# Altium PCB MC_Isolation_PCB.PcbDoc
Units mm, origin at the board's own origin, x right, y up, seen from the top; angles counter-clockwise.
Board outline 93 x 123 mm, 2 copper layers (Top Layer, Bottom Layer); 26 components, 24 nets, 115 pads, 17 vias.
Unrouted connection lines stored in the file: 16.
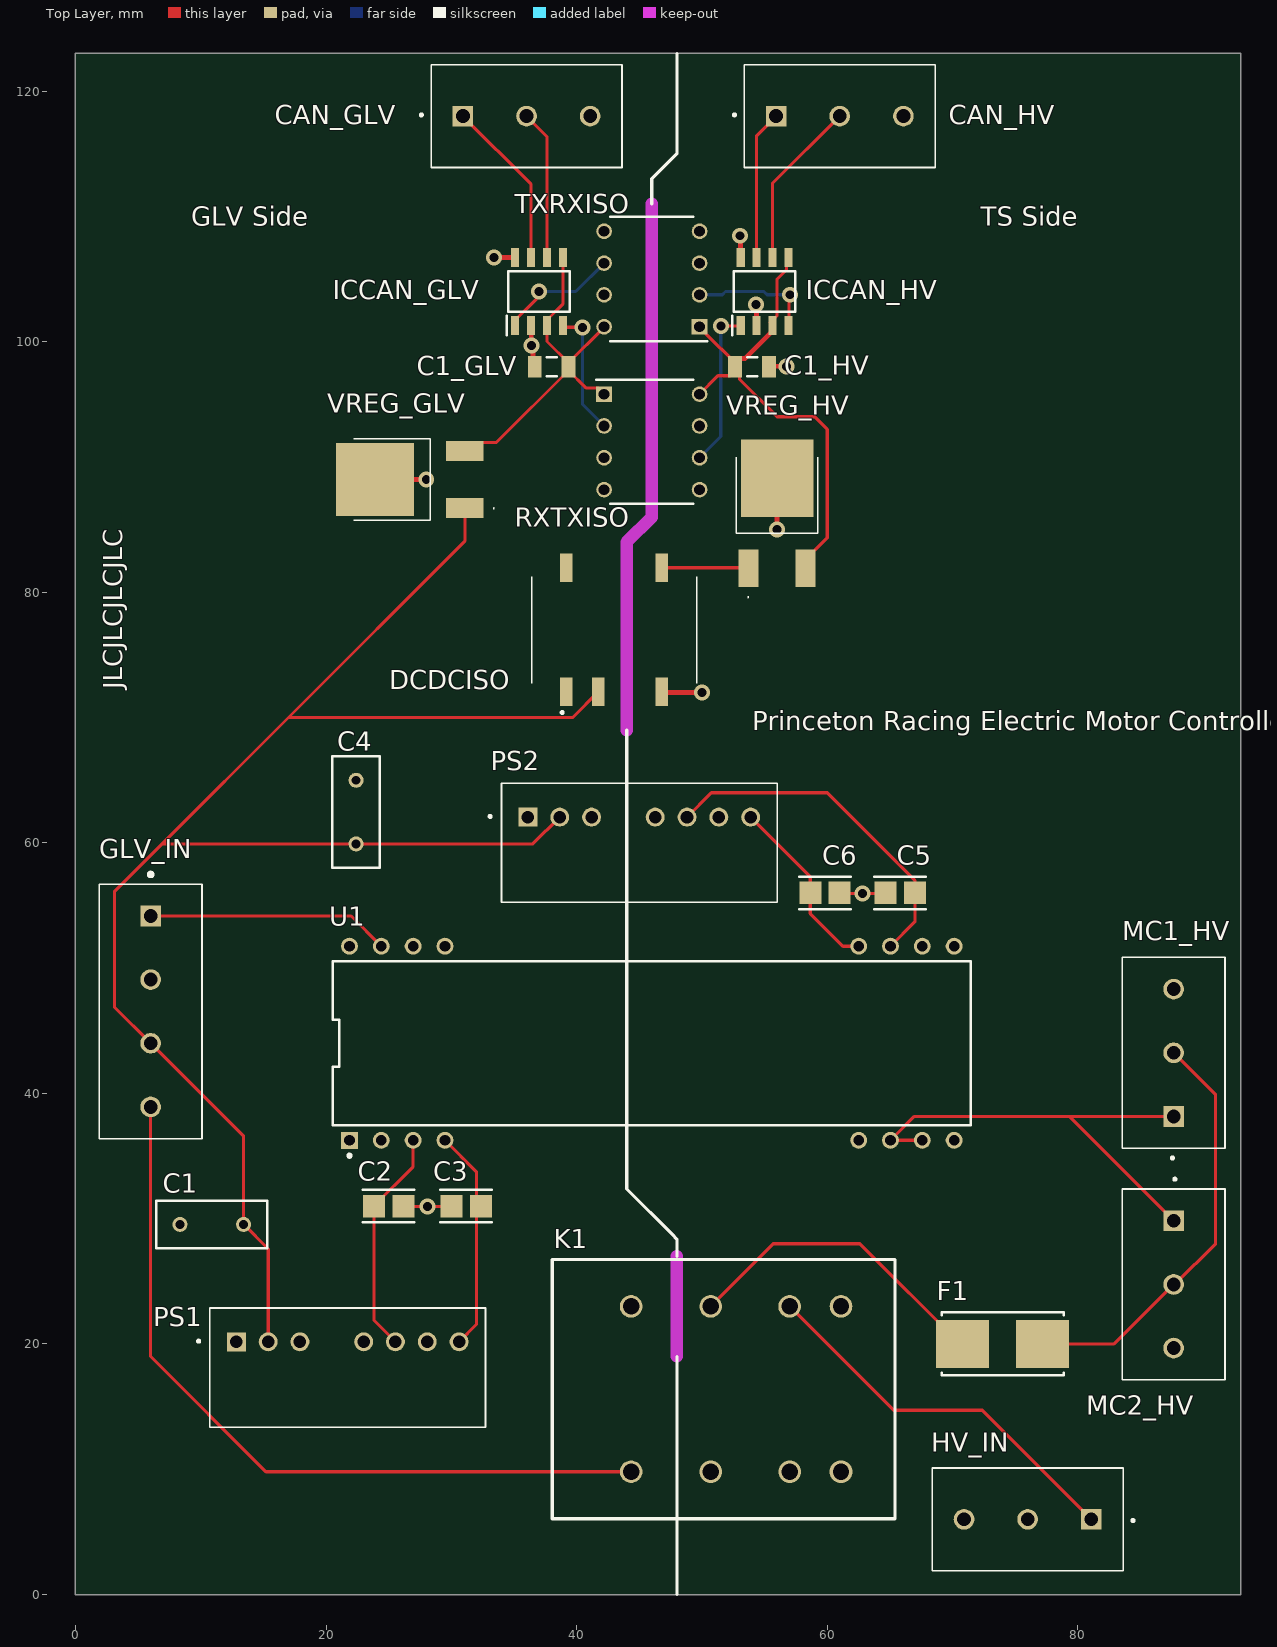
[diagram p0: Top Layer view]
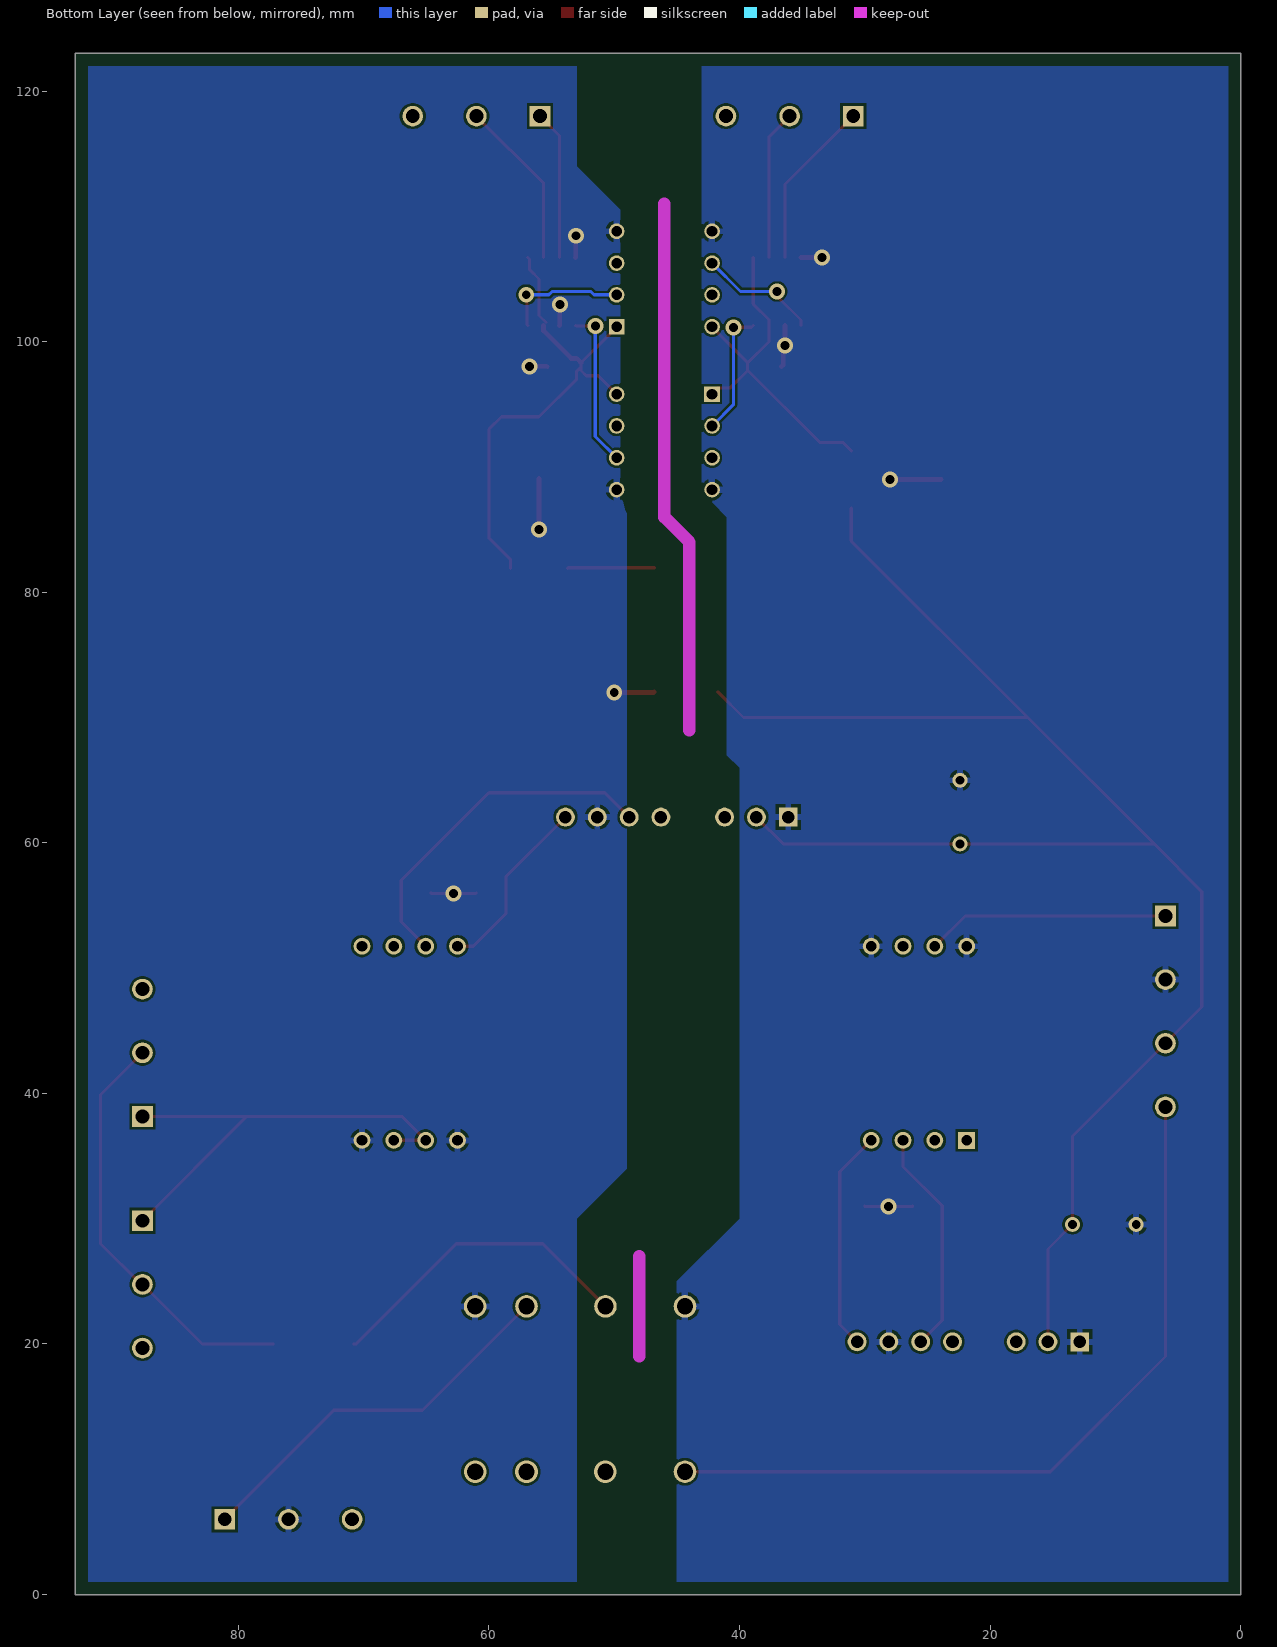
[diagram p1: Bottom Layer view, seen from below]
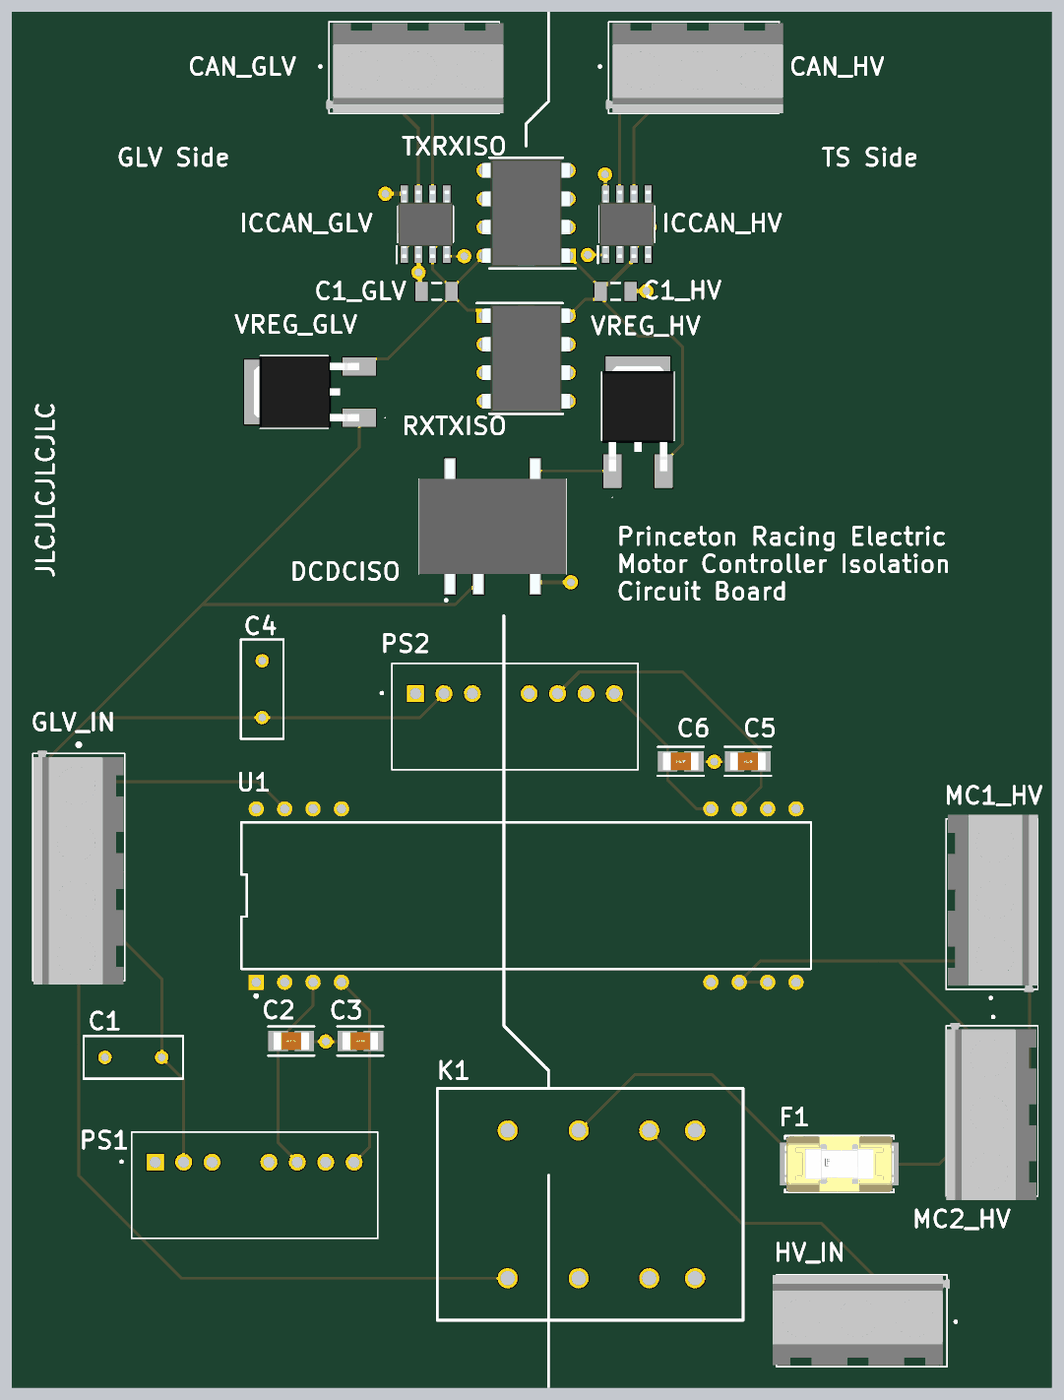
[diagram p2: 3D render of the assembled board from above, using the file's embedded part models]

## Layer stack, top to bottom
Top Solder: solder mask 0.0254, SM-001, Dk 4
Top Layer: signal copper 0.035
Dielectric 1: dielectric 0.32, FR-4, Dk 4.8
Bottom Layer: signal copper 0.035
Bottom Solder: solder mask 0.0254, SM-001, Dk 4

## Board outline
0,0 93,0 93,123 0,123

## Design rules (kind name [scope] priority, off if disabled: settings)
BoardOutlineClearance [All] p1: gap=0.2 ignorepadtopadclearanceinfootprint=FALSE except(0.4: Arc-SplitBarrior Arc-SplitContinuation Track-SplitBarrior Track-SplitContinuation SMDPad-SplitBarrior SMDPad-SplitContinuation THPad-SplitBarrior THPad-SplitContinuation Via-SplitBarrior Via-SplitContinuation Fill-SplitBarrior Fill-SplitContinuation Poly-SplitBarrior Poly-SplitContinuation Region-SplitBarrior Region-SplitContinuation Text-SplitBarrior Text-SplitContinuation)
Clearance Clearance_TS [InNetClass('GLV') vs InNetClass('TS')] p1: gap=6.5 ignorepadtopadclearanceinfootprint=TRUE except(0: Arc-Hole Track-Hole SMDPad-Hole THPad-Hole Via-Hole Fill-Hole Poly-Hole Region-Hole Text-Hole; 0.254: Arc-Text Track-Text SMDPad-Text THPad-Text Via-Text Fill-Text Poly-Text Region-Text Text-Text; 3: THPad-Fill THPad-Poly THPad-Region Via-Fill Via-Poly Via-Region)
Clearance [All] p2: gap=0.2 ignorepadtopadclearanceinfootprint=FALSE except(0.089: Arc-Arc Arc-Track Arc-SMDPad Track-Track Track-SMDPad SMDPad-SMDPad; 0.127: Arc-Via Track-Via SMDPad-Via THPad-Via Via-Via; 0.254: Arc-Text Track-Text SMDPad-Text THPad-Text Via-Text Fill-Text Poly-Text Region-Text Text-Text)
Clearance "Clearance Bottom Layer" [OnLayer('Bottom Layer')] p3: gap=0.203 ignorepadtopadclearanceinfootprint=TRUE except(0.254: Arc-Text Track-Text SMDPad-Text THPad-Text Via-Text Fill-Text Poly-Text Region-Text Text-Text)
Clearance "Clearance Top Layer" [OnLayer('Top Layer')] p4: gap=0.203 ignorepadtopadclearanceinfootprint=TRUE except(0.254: Arc-Text Track-Text SMDPad-Text THPad-Text Via-Text Fill-Text Poly-Text Region-Text Text-Text)
HoleSize [All] p1: absolutevalues=TRUE maxlimit=6.3 minlimit=0.2 maxpercent=80.000 minpercent=20.000
MinimumAnnularRing [All] p1: minimumring=0.076
MinimumSolderMaskSliver [All] p1: minsoldermaskwidth=0.1
PolygonConnect PolygonConnect_1 [All] p1: thpad.connectstyle=Relief thpad.reliefconductorwidth=0.508 thpad.reliefentries=4 thpad.polygonreliefangle="90 Angle" thpad.airgapwidth=0.254 smdpad.connectstyle=Relief smdpad.reliefconductorwidth=0.508 smdpad.reliefentries=4 smdpad.polygonreliefangle="90 Angle" smdpad.airgapwidth=0.254 via.connectstyle=Direct via.reliefconductorwidth=0.508 via.reliefentries=4 via.polygonreliefangle="90 Angle" via.airgapwidth=0.254
PolygonConnect [All] p2: connectstyle=Relief reliefconductorwidth=0.254 reliefentries=4 polygonreliefangle="90 Angle" airgapwidth=0.254
RoomDefinition MC_Isolation_Schematic [InComponentClass('MC_Isolation_Schematic')] p1: confinementstyle=ConfineIn formatcopy=TRUE lockcomponents=FALSE outline 153.543,1.524 205.613,1.524 205.613,56.388 153.543,56.388
RoutingCorners [All] p1: cornerstyle=Round minsetback=2.54 maxsetback=2.54
RoutingVias [All] p1: holewidth=0.5 width=1 viastyle="Through Hole" minholewidth=0.2 minwidth=0.45 maxholewidth=1 maxwidth=2
SilkToSilkClearance [All] p1: silktosilkclearance=0.1
SilkToSolderMaskClearance [IsPad] p1: minsilkscreentomaskgap=0.1 clearancetoexposedcopper=TRUE
SolderMaskExpansion [All] p1: expansion=0.102 istentingtop=FALSE
Width [All] p1: maxlimit=2.54 minlimit=0.089 preferedwidth=0.381
25 further rules are at their usual default settings.

## Classes and differential pairs
net class GLV: GLV_12V GND_IN Ignition_In Throttle_In VS1_Minus VS1_Plus
net class TS: GND_OUT Ignition_Out Ignition_Out_Unfused NetDCDCISO_5 Throttle_Out TS_100V VS2_Minus VS2_Plus

## Components (designator, comment, footprint, x,y, rotation, side; value= is the part's Value field where it differs from the comment)
C1 "100uF" RAD-0.2 10.881,29.538 r0 top
C1_GLV "Cap Semi" C1206 38,98 r0 top value=0.1uF
C1_HV "Cap Semi" C1206 54,98 r180 top value=0.1uF
C2 "22uF" FP-C3216-160-0_2-IPC_B 25,31 r0 top
C3 "22uF" FP-C3216-160-0_2-IPC_B 31.176,31 r0 top
C4 "100uF" RAD-0.2 22.4,62.45 r270 top
C5 "22uF" FP-C3216-160-0_2-IPC_B 65.824,56 r180 top
C6 "22uF" FP-C3216-160-0_2-IPC_B 59.824,56 r180 top
CAN_GLV "282837-3" TE_282837-3 36,118 r0 top
CAN_HV "282837-3" TE_282837-3 61,118 r0 top
DCDCISO "IES0112S09" IES0105S05H 43,77 r0 top
F1 "100mA" FP-0154-MFG 74,20 r0 top value=3.1Ω
GLV_IN "282837-4" TE_282837-4 6,54.16 r270 top
HV_IN "282837-3" TE_282837-3 76,6 r180 top
ICCAN_GLV "MAX14883EASA+" SOIC127P600X175-8N 37,104 r90 top
ICCAN_HV "MAX14883EASA+" SOIC127P600X175-8N 55,104 r90 top
K1 "Relay" PCBComponent_1 38.05,26.75 r270 top
MC1_HV "282837-3" TE_282837-3 87.652,43.24 r90 top
MC2_HV "282837-3" TE_282837-3 87.652,24.751 r270 top
PS1 "PRM1W-E12-D15-S" CONV_PRM1W-E12-D15-S 21.729,18.117 r0 top
PS2 "PRM1W-E12-D15-S" CONV_PRM1W-E12-D15-S 45,60 r0 top
RXTXISO "HCPL-7723-000E" DIP762W65P254L965H470Q8N 46,92 r0 top
TXRXISO "HCPL-7723-000E" DIP762W65P254L965H470Q8N 46,105 r180 top
U1 "ISO121BG" FP-JVD0016A-MFG 46,44 r90 top
VREG_GLV "MC78M05CDTRKG" LM317MADTRKG 27,89 r0 top
VREG_HV "MC78M05CDTRKG" LM317MADTRKG 56,86 r270 top

## Footprints (in the part's own frame and the unit in brackets; to place one, negate y for a bottom-side part, rotate by r counter-clockwise, add the part's x,y. Pads: shape width x height; smd on the part's side, far side on the other; paste and mask are expansions set on the pad)
C1206 [mm] "Chip Capacitor, Body 3.2x1.6mm, IPC High Density"
  rect 1.1x1.7 smd: 1(-1.35,0) 2(1.35,0)
  silkscreen extent -0.4,-0.75 0.4,0.75, body extent -1.7,-0.9 1.7,0.9, height 1.3
CONV_PRM1W-E12-D15-S [mm]
  rect 1.508x1.508 hole 1: 1(-8.89,2.05)
  round 1.508 hole 1: 2(-6.35,2.05) 3(-3.81,2.05) 5(1.27,2.05) 6(3.81,2.05) 7(6.35,2.05) 8(8.89,2.05)
  silkscreen extent -12,-4.75 11,4.75
DIP762W65P254L965H470Q8N [mm]
  rect 1.25x1.25 hole 0.85: 1(-3.81,3.81)
  round 1.25 hole 0.85: 2(-3.81,1.27) 3(-3.81,-1.27) 4(-3.81,-3.81) 5(3.81,-3.81) 6(3.81,-1.27) 7(3.81,1.27) 8(3.81,3.81)
  silkscreen extent -4.43,-4.95 3.3,4.95, body extent -3.97,-4.82 3.97,4.82, height 4.7
FP-0154-MFG [mil]
  rect 167x150 smd paste+0 mask+0: 1(-125.5,0) 2(125.5,0)
  silkscreen extent -192,-99 192,99, body extent -213,-103 213,103, height 10
FP-C3216-160-0_2-IPC_B [mm]
  rect 1.754x1.806 smd paste+0 mask+0: 1(-1.176,0) 2(1.176,0)
  silkscreen extent -2.05,-1.3 2.05,1.3, body extent -2.3,-1.15 2.3,1.15, height 0.25
FP-JVD0016A-MFG [mm]
  rect 1.35x1.35 hole 0.85 paste-1000 mask+0: 1(-7.747,24.13)
  round 1.35 hole 0.85 paste-1000 mask+0: 2(-7.747,21.59) 3(-7.747,19.05) 4(-7.747,16.51) 17(-7.747,-16.51) 18(-7.747,-19.05) 19(-7.747,-21.59) 20(-7.747,-24.13) 21(7.748,-24.13) 22(7.748,-21.59) 23(7.748,-19.05) 24(7.748,-16.51) 37(7.748,16.51) 38(7.748,19.05) 39(7.748,21.59) 40(7.748,24.13)
  silkscreen extent -9.1,-25.46 6.55,25.46
IES0105S05H [mm]
  rect 1x2.29 smd: 1(-3.81,-4.955) 2(-1.27,-4.955) 4(3.81,-4.955) 5(3.81,4.955) 8(-3.81,4.955)
  silkscreen extent -6.6,-6.65 6.6,4.25, body extent -6.6,-6 6.6,6, height 7.45
LM317MADTRKG [mm]
  rect 3x1.6 smd: 1(4.08,-2.285) 3(4.08,2.285)
  rect 6.2x5.8 smd: 2(-3.1,0)
  silkscreen extent -4.79,-3.25 6.43,3.25, body extent -5.32,-3.17 4.08,3.18, height 2.18
PCBComponent_1 [mm]
  round 1.8 hole 1.3: 1(3.75,12.65) 2(3.75,23.05) 3(3.75,18.95) 4(16.95,6.3) 5(3.75,6.3)
  silkscreen extent 0,0 20.7,27.35
RAD-0.2 [mm] "Radial Cap, Thru-Hole; 2 Leads; 0.2 in Pin Spacing"
  round 1.2 hole 0.7: 1(-2.54,0) 2(2.54,0)
  silkscreen extent -4.45,-1.9 4.44,1.91
SOIC127P600X175-8N [mm]
  rect 1.525x0.65 smd: 1(-2.712,1.905) 2(-2.712,0.635) 3(-2.712,-0.635) 4(-2.712,-1.905) 5(2.712,-1.905) 6(2.712,-0.635) 7(2.712,0.635) 8(2.712,1.905)
  silkscreen extent -3.47,-2.45 1.6,2.58, body extent -3,-2.45 3,2.45, height 1.75
TE_282837-3 [mm]
  rect 1.65x1.65 hole 1.1: 1(-5.08,0)
  round 1.65 hole 1.1: 2(0,0) 3(5.08,0)
  silkscreen extent -8.5,-4.1 7.62,4.1, body extent -7.87,-4.1 7.97,4.1, height 7.25
TE_282837-4 [mm]
  rect 1.65x1.65 hole 1.1: 1(0,0)
  round 1.65 hole 1.1: 2(5.08,0) 3(10.16,0) 4(15.24,0)
  silkscreen extent -3.46,-4.1 17.78,4.1, body extent -2.79,-4.06 18.13,4.14, height 7.25

## Part data
C1 C4: library part Cap, "Capacitor", LatestRevisionDate=17-Jul-2002, LatestRevisionNote="Re-released for DXP Platform.", PackageDescription="Radial Cap, Thru-Hole; 2 Leads; 0.3 in Pin Spacing", PackageReference=RAD-0.3, Published=8-Jun-2000, Publisher="Altium Limited"
C1_GLV C1_HV: "Capacitor (Semiconductor SIM Model)", LatestRevisionDate=29-May-2009, LatestRevisionNote="IPC-7351 Footprint Added.", PackageDescription="Chip Capacitor", PackageReference=C1206, Published=8-Jun-2000, Publisher="Altium Limited"
C2 C3 C5 C6: library part CMP-2000-05402-2, "Multilayer Ceramic Capacitors 1uF ±10% 50V X7R SMD 1206", Capacitance=1uF, Case Code (Imperial)=1206, Case Code (Metric)=3216, Dielectric=X7R, Dielectric Material=Ceramic, Max Operating Temperature=125°C, Min Operating Temperature=-55°C, Package Quantity=2000, Tolerance=10%, Voltage=25V, Voltage Rating=50V, Case/Package=1206, Depth=1.6mm, Height=1.6mm, Lead Free="Lead Free", Length=0.126inch, Mount="Surface Mount", Number of Pins=2, Packaging="Tape and Reel", Radiation Hardening=No, REACH SVHC="No SVHC", Resistor Type=Ceramic, RoHS Compliant=Yes, Series=C, Termination=SMD/SMT, Thickness=0.071inch, Voltage Rating (DC)=50V, Weight=0.000571oz, Width=0.063inch
CAN_GLV CAN_HV HV_IN MC1_HV MC2_HV: "Wire to Board 3 Position 5.08 mm Pitch 30-16 AWG Euro Style Terminal Block", Package=None, Availability=Good, Check_prices=https://www.snapeda.com/parts/282837-3/TE%20Connectivity%20AMP%20Connectors/view-part/2765182/?ref=eda, MF="TE Connectivity", MP=282837-3, Price=None, Purchase-URL=https://pricing.snapeda.com/search/part/282837-3/?ref=eda, SnapEDA_Link=https://www.snapeda.com/parts/282837-3/TE%20Connectivity%20AMP%20Connectors/view-part/2765182/?ref=snap
DCDCISO: library part IES0105S03, "Power Supply", Manufacturer_Name="XP POWER", Mouser Part Number=209-IES0105S03, Datasheet Link=https://www.mouser.com/datasheet/2/942/SF_IES01-1666999.pdf, Height=7.35mm, Manufacturer_Part_Number=IES0105S03, Mouser Price/Stock=https://www.mouser.co.uk/ProductDetail/XP-Power/IES0105S03?qs=Cb2nCFKsA8rLXqfTpxCsOw%3D%3D
F1: library part CMP-08605-000075-1, "FUSE BOARD MNT 100MA 125VAC/VDC", Fuse Current=0.1A, Manufacturer="Littelfuse Inc", Manufacturer Part Number=0154.100DR, Max Fuse Ac Voltage=125V, Package=0154, Resistance=3.1Ω, Temperature="-55°C to +125°C", Temperature Range High=+125°C, Temperature Range Low=-55°C, Automotive=No, Category=Fuse, ComponentLink2Description=Datasheet, ComponentLink2URL=https://www.littelfuse.com/~/media/electronics/datasheets/fuses/littelfuse_fuse_154_154t_154l_154tl_datasheet.pdf.pdf, Device Class L1="Circuit Protection", Device Class L2=Fuses, Device Class L3=unset, Digikey Description="FUSE BOARD MNT 100MA 125VAC/VDC", Fuse Blow Speed=Fast, Fuse I2T=0.00138A2Sec, Height=3.81mm, Lead Free=Yes, Max Fuse Dc Voltage=125V, Mouser Description="Surface Mount Fuses Fuseblck w/ fuse .1A OMNI BLOK 154", Octopart=https://octopart.com/0154.100dr-littelfuse-557956, RoHS=TRUE, Voltage Rating=125V
GLV_IN: "4 Position Wire to Board Terminal Block Horizontal with Board 0.200 (5.08mm)", Package=None, Availability=Good, Check_prices=https://www.snapeda.com/parts/282837-4/TE%20Connectivity%20AMP%20Connectors/view-part/520354/?ref=eda, EU_RoHS_Compliance="Compliant with Exemptions", MF="TE Connectivity", MP=282837-4, Price=None, Purchase-URL=https://pricing.snapeda.com/search/part/282837-4/?ref=eda, SnapEDA_Link=https://www.snapeda.com/parts/282837-4/TE%20Connectivity%20AMP%20Connectors/view-part/520354/?ref=snap
ICCAN_GLV ICCAN_HV: "Integrated Circuit", Manufacturer_Name="Maxim Integrated", Mouser Part Number=700-MAX14883EASA+, Datasheet Link=https://pdfserv.maximintegrated.com/en/ds/MAX14883E.pdf, Height=1.75mm, Manufacturer_Part_Number=MAX14883EASA+, Mouser Price/Stock=https://www.mouser.co.uk/ProductDetail/Maxim-Integrated/MAX14883EASA%2b?qs=u4fy%2FsgLU9On%252BQO2HrFXrQ%3D%3D
K1: "SPDT Relay", LatestRevisionDate=17-Jul-2002, LatestRevisionNote="Re-released for DXP Platform.", PackageReference=MODULE5B, Published=8-Jun-2000, Publisher="Altium Limited"
PS1 PS2: "1 W, 8:1 Input Range, Single/Dual Regulated Output, 8 Pin SIP, 3000 Vdc Isolation, Dc-Dc Converter", Package=None, Availability=Unavailable, MF="{'manufacturer': u'CUI'}", MP=PRM1W-E12-D15-S, Price=None
RXTXISO TXRXISO: "Integrated Circuit", Manufacturer_Name="Avago Technologies", Mouser Part Number=630-HCPL-7723-000E, Datasheet Link=https://docs.broadcom.com/docs/AV02-0643EN, Height=4.7mm, Manufacturer_Part_Number=HCPL-7723-000E, Mouser Price/Stock=https://www.mouser.co.uk/ProductDetail/Broadcom-Avago/HCPL-7723-000E/?qs=s%252BgfxR24RQ7gIQcj6Xe%2F1Q%3D%3D
U1: library part CMP-0998-00014-3, "IC OPAMP ISOLATION 1 CIRC 16CDIP", Input Offset Voltage (Vos)=100mV, Input Resistance=200kR, Max Dual Supply Voltage=18V, Max Operating Temperature=125°C, Min Dual Supply Voltage=4.5V, Min Operating Temperature=-55°C, Operating Supply Current=4mA, Output Current per Channel=15mA, Package Quantity=1, Voltage Gain=0dB, -3db Bandwidth=60kHz, Lead Free="Lead Free", Number of Channels=1, Number of Circuits=1, Number of Elements=1, Number of Pins=16, Operating Supply Voltage=18V, Packaging=Rail/Tube, Radiation Hardening=No, RoHS Compliant=Yes, Slew Rate=2V/µs
VREG_GLV VREG_HV: "Integrated Circuit", Manufacturer_Name="ON Semiconductor", Mouser Part Number=863-MC78M05CDTRKG, Arrow Part Number=MC78M05CDTRKG, Arrow Price/Stock=https://www.arrow.com/en/products/mc78m05cdtrkg/on-semiconductor?region=europe, Datasheet Link=https://docs.rs-online.com/cd82/0900766b814af7ce.pdf, Height=2.38mm, Manufacturer_Part_Number=MC78M05CDTRKG, Mouser Price/Stock=https://www.mouser.co.uk/ProductDetail/onsemi/MC78M05CDTRKG?qs=%252B9%2Fcbd0IE0SPz25z2gjikg%3D%3D

## Via types
v1: diameter 1.27, hole 0.711, Top Layer to Bottom Layer, 14 vias
v2: diameter 1.8, hole 1.3, Top Layer to Bottom Layer, 3 vias

## Nets (pads, with @x,y where several pads share a name; then routed paths per layer and width w, separated by ;. In a path a pad name is that pad's centre, name@x,y a point inside that pad or via, vN(x,y) a via of type N, cw(c..) or ccw(c..) an arc to the next point about the centre after c; other vN are vias at no path point)
GLV_12V: C1.2 C4.2 DCDCISO.2 GLV_IN.3 PS1.2 PS2.2 VREG_GLV.1 | length 141.4
  Top Layer w0.254: PS1.2 15.379,27.58 C1.2 13.421,36.579 GLV_IN.3 3.105,46.895 3.105,56.105 6.91,59.91 ; VREG_GLV.1 31.08,84.08 17,70 ; PS2.2 36.51,59.91 C4.2 6.91,59.91 ; DCDCISO.2 39.685,70 17,70 ; 6.91,59.91 17,70
GND_IN: C1.1 C1_GLV.1 C2.2 C3.1 C4.1 DCDCISO.1 GLV_IN.2 ICCAN_GLV.2 ICCAN_GLV.8 K1.5 PS1.1 PS1.7 PS2.1 RXTXISO.4 TXRXISO.5 U1.37 U1.40 VREG_GLV.2 | length 13
  Top Layer w0.254: C2.2 26.218,30.958 v1(28.095,30.958) 29.958,30.958 C3.1
  Top Layer w0.381: VREG_GLV.2 v1(28,89) ; v1(33.419,106.722) 35.085,106.722 ICCAN_GLV.8 ; ICCAN_GLV.2 36.375,101.278 36.375,99.709 v1(36.385,99.699) 36.517,99.567 36.517,98.133 C1_GLV.1
GND_OUT: C1_HV.1 C5.2 C6.1 DCDCISO.4 HV_IN.2 ICCAN_HV.2 ICCAN_HV.8 K1.2 PS2.7 RXTXISO.5 TXRXISO.4 U1.17 U1.20 VREG_HV.2 | length 15.9
  Top Layer w0.254: C6.1 61.039,55.961 v1(62.816,55.961) 64.609,55.961 C5.2
  Top Layer w0.381: DCDCISO.4 46.855,72 v1(50,72) ; v1(53.052,108.453) 53.073,108.432 53.073,106.734 ICCAN_HV.8 ; v1(54.33,102.971) 54.348,102.953 54.348,101.298 54.361,101.284 ICCAN_HV.2 ; C1_HV.1 55.379,98.029 v1(56.747,98.029) ; v1(56,85) VREG_HV.2
Ignition_In: GLV_IN.4 K1.4 | length 62.1
  Top Layer w0.254: GLV_IN.4 6,19 15.2,9.8 K1.4
Ignition_Out: F1.2 MC1_HV.2 MC2_HV.2 | length 33.7
  Top Layer w0.254: F1.2@77.2,20 82.901,20 MC2_HV.2 87.751,24.751 91,28 91,39.892 MC1_HV.2
Ignition_Out_Unfused: F1.1 K1.1 | length 25.5
  Top Layer w0.254: K1.1 55.7,28 62.596,28 70.596,20 F1.1
NetC1_GLV_2: C1_GLV.2 ICCAN_GLV.3 ICCAN_GLV.5 RXTXISO.1 TXRXISO.8 VREG_GLV.3 | length 28.9
  Top Layer w0.254: VREG_GLV.3 31.753,91.958 33.608,91.958 C1_GLV.2@39.35,97.7 ; ICCAN_GLV.5 38.905,102.996 37.635,101.726 ICCAN_GLV.3 37.635,100.015 C1_GLV.2@39.35,98.3 ; RXTXISO.1 41.692,96.308 40.742,96.308 C1_GLV.2@39.35,97.7 ; TXRXISO.8 42.19,101.14 C1_GLV.2@39.35,98.3 ; C1_GLV.2@39.35,97.7 C1_GLV.2 C1_GLV.2@39.35,98.3
NetC1_HV_2: C1_HV.2 ICCAN_HV.3 ICCAN_HV.5 RXTXISO.8 TXRXISO.1 VREG_HV.3 | length 40.2
  Top Layer w0.254: RXTXISO.8 51.277,97.277 52.227,97.277 52.65,97.7 C1_HV.2 ; TXRXISO.1 50.308,100.692 50.308,100.642 52.65,98.3 C1_HV.2 ; ICCAN_HV.3@55.437,101.528 56,102.091 56,105 56.749,105.749 56.749,106.556 ICCAN_HV.5 ; VREG_HV.3 58.285,82.62 60,84.335 60,93 59,94 56,94 53,97 53,97.65 C1_HV.2
  Top Layer w0.381: C1_HV.2@52.65,98.3 53.009,98.66 53.444,98.66 55.635,100.851 ICCAN_HV.3
NetCAN_GLV_1: CAN_GLV.1 ICCAN_GLV.7 | length 13.5
  Top Layer w0.254: CAN_GLV.1 36.365,112.555 ICCAN_GLV.7
NetCAN_GLV_2: CAN_GLV.2 ICCAN_GLV.6 | length 12
  Top Layer w0.254: CAN_GLV.2 37.635,116.365 ICCAN_GLV.6
NetCAN_HV_1: CAN_HV.1 ICCAN_HV.7 | length 11.9
  Top Layer w0.254: ICCAN_HV.7 54.365,116.445 CAN_HV.1
NetCAN_HV_2: CAN_HV.2 ICCAN_HV.6 | length 13.5
  Top Layer w0.254: ICCAN_HV.6 55.635,112.635 CAN_HV.2
NetDCDCISO_5: DCDCISO.5 VREG_HV.1 | length 6.9
  Top Layer w0.254: DCDCISO.5 53.68,81.955 VREG_HV.1
NetICCAN_GLV_1: ICCAN_GLV.1 TXRXISO.6 | length 9.6
  Top Layer w0.254: ICCAN_GLV.1 35.095,101.726 36.806,103.436 36.806,103.806 v1(37,104)
  Bottom Layer w0.254: v1(37,104) 39.92,104 TXRXISO.6
NetICCAN_GLV_4: ICCAN_GLV.4 RXTXISO.2 | length 10.2
  Top Layer w0.254: ICCAN_GLV.4 39.048,101.145 v1(40.47,101.145)
  Bottom Layer w0.254: v1(40.47,101.145) 40.47,94.99 RXTXISO.2
NetICCAN_HV_1: ICCAN_HV.1 RXTXISO.6 | length 12.8
  Top Layer w0.254: v1(51.51,101.254) 53.061,101.254 ICCAN_HV.1
  Bottom Layer w0.254: RXTXISO.6 51.51,92.43 v1(51.51,101.254)
NetICCAN_HV_4: ICCAN_HV.4 TXRXISO.2 | length 9.9
  Top Layer w0.254: ICCAN_HV.4 56.962,101.345 56.962,103.687 v1(57.02,103.744)
  Bottom Layer w0.254: TXRXISO.2 49.817,103.737 51.616,103.737 51.879,104 54.951,104 55.214,103.737 57.013,103.737 v1(57.02,103.744)
Throttle_In: GLV_IN.1 U1.39 | length 19.4
  Top Layer w0.254: GLV_IN.1 21.998,54.16 U1.39
Throttle_Out: MC1_HV.1 MC2_HV.1 U1.18 U1.19 | length 37.7
  Top Layer w0.254: 66.958,38.161 U1.18 U1.19 ; 66.961,38.161 MC1_HV.1 ; 79.358,38.139 79.358,38.124 MC2_HV.1
TS_100V: HV_IN.1 K1.3 | length 31.1
  Top Layer w0.254: K1.3 65.299,14.701 72.379,14.701 HV_IN.1
VS1_Minus: C3.2 PS1.8 U1.4 | length 17.7
  Top Layer w0.254: U1.4 32,33.743 32,31 32,21.548 PS1.8
VS1_Plus: C2.1 PS1.6 U1.3 | length 18.1
  Top Layer w0.254: PS1.6 23.824,21.882 C2.1 23.824,31.026 26.95,34.152 U1.3
VS2_Minus: C6.2 PS2.8 U1.24 | length 14.6
  Top Layer w0.254: PS2.8 58.648,57.292 C6.2 58.648,54.352 61.252,51.748 U1.24
VS2_Plus: C5.1 PS2.6 U1.23 | length 28
  Top Layer w0.254: PS2.6 50.76,64 60,64 66,58 67,57 C5.1 67,53.698 U1.23
pads on no net: CAN_GLV.3 CAN_HV.3 DCDCISO.8 HV_IN.3 MC1_HV.3 MC2_HV.3 PS1.3 PS1.5 PS2.3 PS2.5 RXTXISO.3 RXTXISO.7 TXRXISO.3 TXRXISO.7 U1.1 U1.2 U1.21 U1.22 U1.38
copper on no net:
  other v2: 50.7,9.8 57,9.8 61.1,9.8

## Polygon pours and split planes (outlines as drawn)
GND_OUT on Bottom Layer "GND_OUT_L02_P006" (solid, pour order 6): 92,122 53,122 53,114 52,113 49,110 49,34 53,30 53,1 92,1
GND_IN on Bottom Layer "GND_IN_L02_P005" (solid, pour order 5): 1,122 43,122 43,88 41,86 41,67 40,66 40,30 45,25 45,1 1,1

## Keep-outs
Keep-Out Layer:
  lines w1: 44,69 44,84 46,86 46,111 ; 48,19 48,27

## Silkscreen, mask and mechanical layers (free items; w line width, h text height)
Top Overlay:
  lines w0.254: 44,69 44,67.661 44,34 44,32.37 47.627,28.744 48,28.37 48,28 48,27 ; 46,111 46,113 48,115 48,123 ; 48,0 48,19
  text "GLV Side" at 9.254,109.254 h1.52
  text "TS Side" at 72.254,109.254 h1.52
  text "JLCJLCJLCJLC" at 3.746,72.254 h1.52 r90
  text "Princeton Racing Electric Motor Controller Isolation Circuit Board" at 54,69 h1.52